# EAGLE board big_8x16 (EAGLE 6.2)
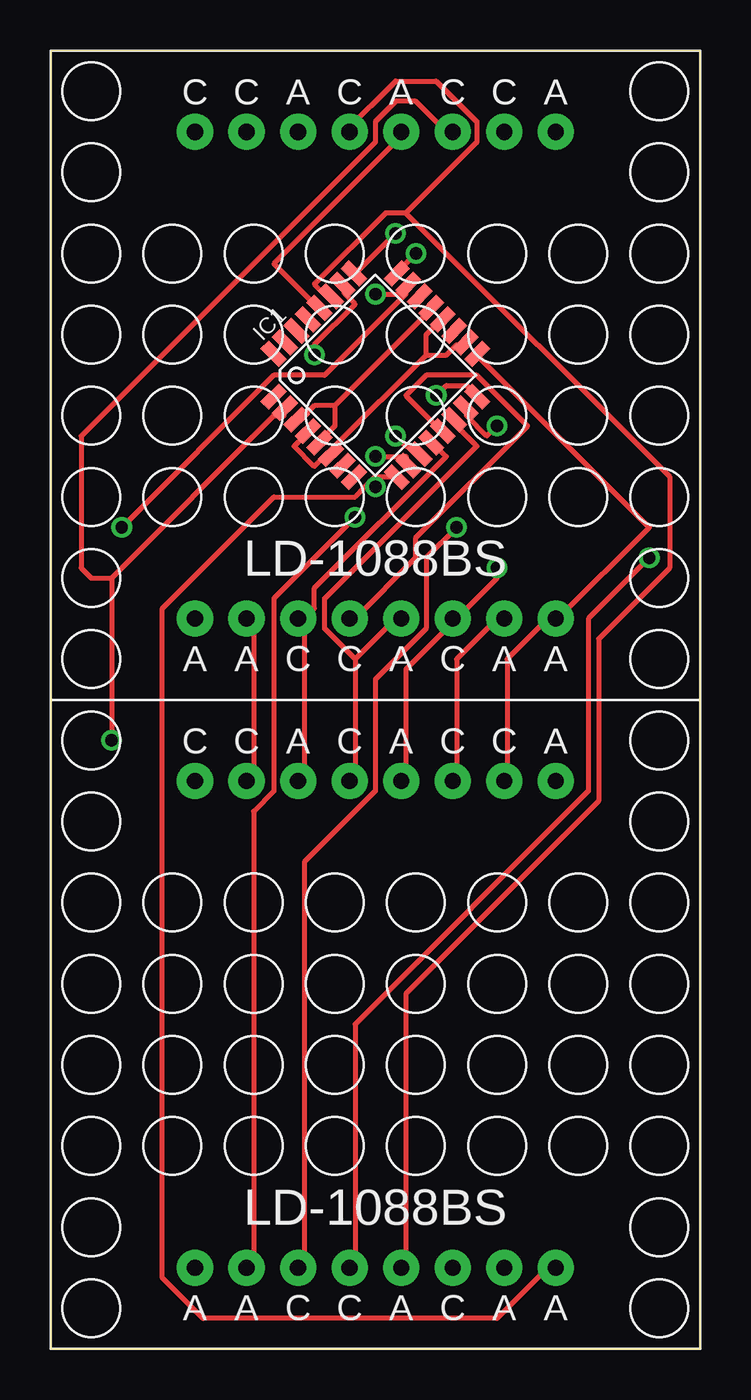
[diagram p0: board, top side]
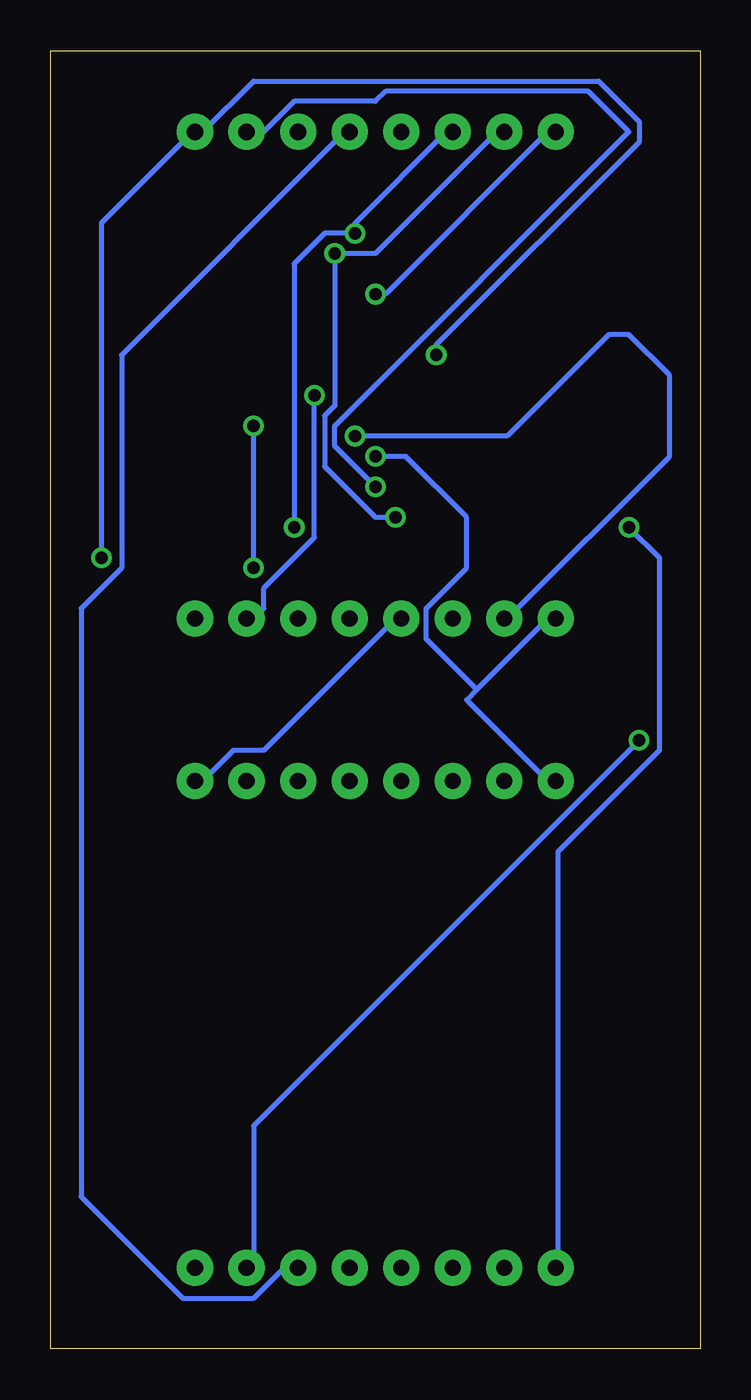
[diagram p1: board, bottom side, seen from below]

Size 32 x 64 mm. Coordinates in mm from the lower left corner, seen from the top.
Outline: 0,0 32,0 32,64 0,64 0,0
Copper layers (1*16): Top 0.035mm / dielectric 1.5mm / Bottom 0.035mm
Design rules: minimum track width 10mil, minimum drill 24mil, track to track 6mil, track to pad 6mil, pad to pad 6mil, via to via 6mil, smd to smd 6mil, copper to edge 40mil, drill to drill 8mil, minimum pad ring 10mil, minimum via ring 8mil, stop-mask expansion 4mil, vias tented up to drill 0mil, thermal gap 10mil

## Footprints (pad centres in the part's own frame; a part is rotated, then mirrored left to right if it is on the bottom)
TQFP32-08 = smd 1.27 x 0.559: 1 -4.293,2.8; 2 -4.293,2; 3 -4.293,1.2; 4 -4.293,0.4; 5 -4.293,-0.4; 6 -4.293,-1.2; 7 -4.293,-2; 8 -4.293,-2.8; 17 4.293,-2.8; 18 4.293,-2; 19 4.293,-1.2; 20 4.293,-0.4; 21 4.293,0.4; 22 4.293,1.2; 23 4.293,2; 24 4.293,2.8 | smd 0.559 x 1.27: 9 -2.8,-4.293; 10 -2,-4.293; 11 -1.2,-4.293; 12 -0.4,-4.293; 13 0.4,-4.293; 14 1.2,-4.293; 15 2,-4.293; 16 2.8,-4.293; 25 2.8,4.293; 26 2,4.293; 27 1.2,4.293; 28 0.4,4.293; 29 -0.4,4.293; 30 -1.2,4.293; 31 -2,4.293; 32 -2.8,4.293
LD-1088BS = drill 0.8 pad 1.778: A1 8.89,12; A2 1.27,12; A3 -3.81,12; A4 8.89,-12; A5 6.35,-12; A6 1.27,-12; A7 -6.35,-12; A8 -8.89,-12; C1 6.35,12; C2 3.81,12; C3 -1.27,12; C4 -6.35,12; C5 -8.89,12; C6 3.81,-12; C7 -1.27,-12; C8 -3.81,-12

## Placement (x,y rotation side)
IC1  MEGA8-AI  [TQFP32-08]  16,48 45 top
U$1  LD-1088BS  [LD-1088BS]  16,16 0 top
U$2  LD-1088BS  [LD-1088BS]  16,48 0 top

## Library data of the parts
IC1 = atmel; MPN: ATMEGA8-16AU; OC_FARNELL: 9171371; OC_NEWARK: 73M8863
U$1 U$2 = mrule

## Nets
N$1: IC1.24 U$1.A7 U$2.C4
N$2: IC1.25 U$1.C8 U$2.A3
N$3: IC1.26 U$1.C7 U$2.A1
N$4: IC1.27 U$1.A6 U$2.C3
N$5: IC1.28 U$1.C6 U$2.A2
N$6: IC1.2 U$1.A5 U$2.C2
N$7: IC1.9 U$1.A4 U$2.C1
N$8: IC1.15 U$1.A2 U$2.C6
N$9: IC1.14 U$1.C3 U$2.A6
N$10: IC1.13 U$1.A1 U$2.C7
N$11: IC1.12 U$1.A3 U$2.C8
N$12: IC1.11 U$1.C4 U$2.A7
N$13: IC1.10 U$1.C5 U$2.A8
N$14: IC1.16 U$1.C2 U$2.A5
N$15: IC1.17 U$1.C1 U$2.A4
N$17: IC1.23 U$1.A8 U$2.C5
N$18: IC1.3 IC1.5 IC1.21
N$19: IC1.4 IC1.6 IC1.18 IC1.20

## Tracks (layer width: path | path; a pad name or v marks a point on that pad's centre or on a via)
N$1  (via drill 0.61)
  Top 0.254: v18,54 17,53 IC1.24 | v15,41 11,37 11,27.5 10,26.5 10,4 U$1.A7
  Bottom 0.254: U$2.C4 10,60 16,54 v18,54 18,46.5 18.5,46 18.5,43.5 16,41 v15,41
N$2  (via drill 0.61)
  Top 0.254: v17,55 15,53 IC1.25 | v20,40.5 18.5,39 18.5,35.5 16,33 16,27.5 12.5,24 12.5,4 U$1.C8
  Bottom 0.254: U$2.A3 12.5,60 17,55.5 v17,55 18.5,55 20,53.5 v20,40.5
N$3  (via drill 0.61)
  Top 0.254: v13,49 13,49.5 15,51.5 14.5,52 IC1.26 | v29.5,39 26.5,36 26.5,27.5 15,16 15,4 U$1.C7
  Bottom 0.254: v13,49 13,49.5 3,59.5 3,60.5 5,62.5 22,62.5 24.5,60 U$2.A1 25,60 29.5,55.5 v29.5,39
N$4
  Top 0.254: 17.5,56 16.5,56 13,52.5 13.5,52 IC1.27 | 17.5,56 21,59.5 21,60.5 19,62.5 17,62.5 14.5,60 U$2.C3 | 17.5,56 30.5,43 30.5,38.5 27,35 27,27 17.5,17.5 17.5,4 U$1.A6
N$5
  Top 0.254: IC1.28 13,51.5 11,53.5 17.5,60 U$2.A2
  Bottom 0.254: U$1.C6 20.5,4 22,2.5 25.5,2.5 30.5,7.5 30.5,36.5 28.5,38.5 28.5,49 17.5,60 U$2.A2
N$6  (via drill 0.61)
  Top 0.254: 3,38 11,46 11.5,46 IC1.2 | 3,38 2,38 1.5,38.5 1.5,45 16,59.5 16,60.5 17,61.5 18,61.5 19.5,60 U$2.C2 | 3,38 v3,30
  Bottom 0.254: v3,30 22,11 22,4 U$1.A5
N$7  (via drill 0.61)
  Top 0.254: 15.5,42.5 15,42 11,42 5.5,36.5 5.5,3.5 7.5,1.5 22,1.5 24.5,4 U$1.A4 | 15.5,42.5 16,43 17,43 IC1.9 | 15.5,42.5 v16,42.5
  Bottom 0.254: U$2.C1 21.5,60 20,61.5 16,61.5 15.5,62 5.5,62 3.5,60 18,45.5 18,44.5 v16,42.5
N$8  (via drill 0.61)
  Top 0.254: v22,45.5 21.5,45 20.5,46 IC1.15 | v22,38.5 22,38 20,36 | 20,36 17.5,33.5 17.5,28 U$1.A2 | 20,36 U$2.C6
  Bottom 0.254: v22,38.5 v22,45.5
N$9
  Top 0.254: 15,34 13.5,35.5 13.5,37 21,44.5 20,45.5 IC1.14 | 15,34 17,36 U$2.A6 | 15,34 15,28 U$1.C3
N$10
  Top 0.254: IC1.13 19,45.5 17.5,47 18.5,48 21,48 23.5,45.5 18,40 18,39 15,36 U$2.C7
  Bottom 0.254: U$1.A1 24.5,28 23,29.5 21.5,29.5 15,36 U$2.C7
N$11
  Top 0.254: 12.5,36 13,36.5 13,37.5 19.5,44 19,44.5 IC1.12 | 12.5,36 12.5,28 U$1.A3 | 12.5,36 U$2.C8
N$12  (via drill 0.61)
  Top 0.254: v17,45 17.5,44.5 18,44.5 IC1.11 | U$1.C4 10,28 10,36 U$2.A7
  Bottom 0.254: v17,45 9.5,45 4.5,50 3.5,50 1.5,48 1.5,44 9.5,36 U$2.A7
N$13  (via drill 0.61)
  Top 0.254: v16,44 17.5,44 IC1.10
  Bottom 0.254: v16,44 14.5,44 11.5,41 11.5,38.5 13.5,36.5 13.5,35 11,32.5 | 11,32.5 7.5,36 U$2.A8 | 11,32.5 11.5,32 7.5,28 U$1.C5
N$14  (via drill 0.61)
  Top 0.254: v19,47 19.5,47.5 20.5,47.5 21,47 IC1.16 | U$1.C2 20,28 20,34 22,36 U$2.A5
  Bottom 0.254: v19,47 19,40 21.5,37.5 21.5,36.5 22,36 U$2.A5
N$15
  Top 0.254: IC1.17 21,49 29.5,40.5 25,36 U$2.A4 24.5,36 22.5,34 22.5,28 U$1.C1
N$17  (via drill 0.61)
  Top 0.254: v16,52 17.5,52 | v3.5,40.5 11,48 13.5,48 17.5,52 | 17.5,52 IC1.23
  Bottom 0.254: v16,52 15.5,52 7.5,60 U$2.C5 | v3.5,40.5 2,39 2,29.5 7,24.5 7,4 U$1.A8
N$18
  Top 0.254: 14,46.5 13,46.5 12.5,46 IC1.3 | 14,46.5 18.5,51 IC1.21 | 14,46.5 14,45.5 13.5,45 IC1.5
N$19
  Top 0.254: IC1.4 12.5,45 12,44.5 13,43.5 13.5,44 IC1.6 14,44.5 18.5,49 | 18.5,49 18.5,50 19,50.5 IC1.20 | 18.5,49 19.5,49 20,49.5 IC1.18